# Altium PCB Localization.PcbDoc (part 2 of 2)
Units mil, origin at the board's own origin, x right, y up, seen from the top; angles counter-clockwise.
Board outline 3937.01 x 3937.01 mil, 4 copper layers (Top Layer, GND, POWER, GND_2), stack 23.756 mil thick; 104 components, 64 nets, 363 pads, 70 vias.
Unrouted connection lines stored in the file: 17.
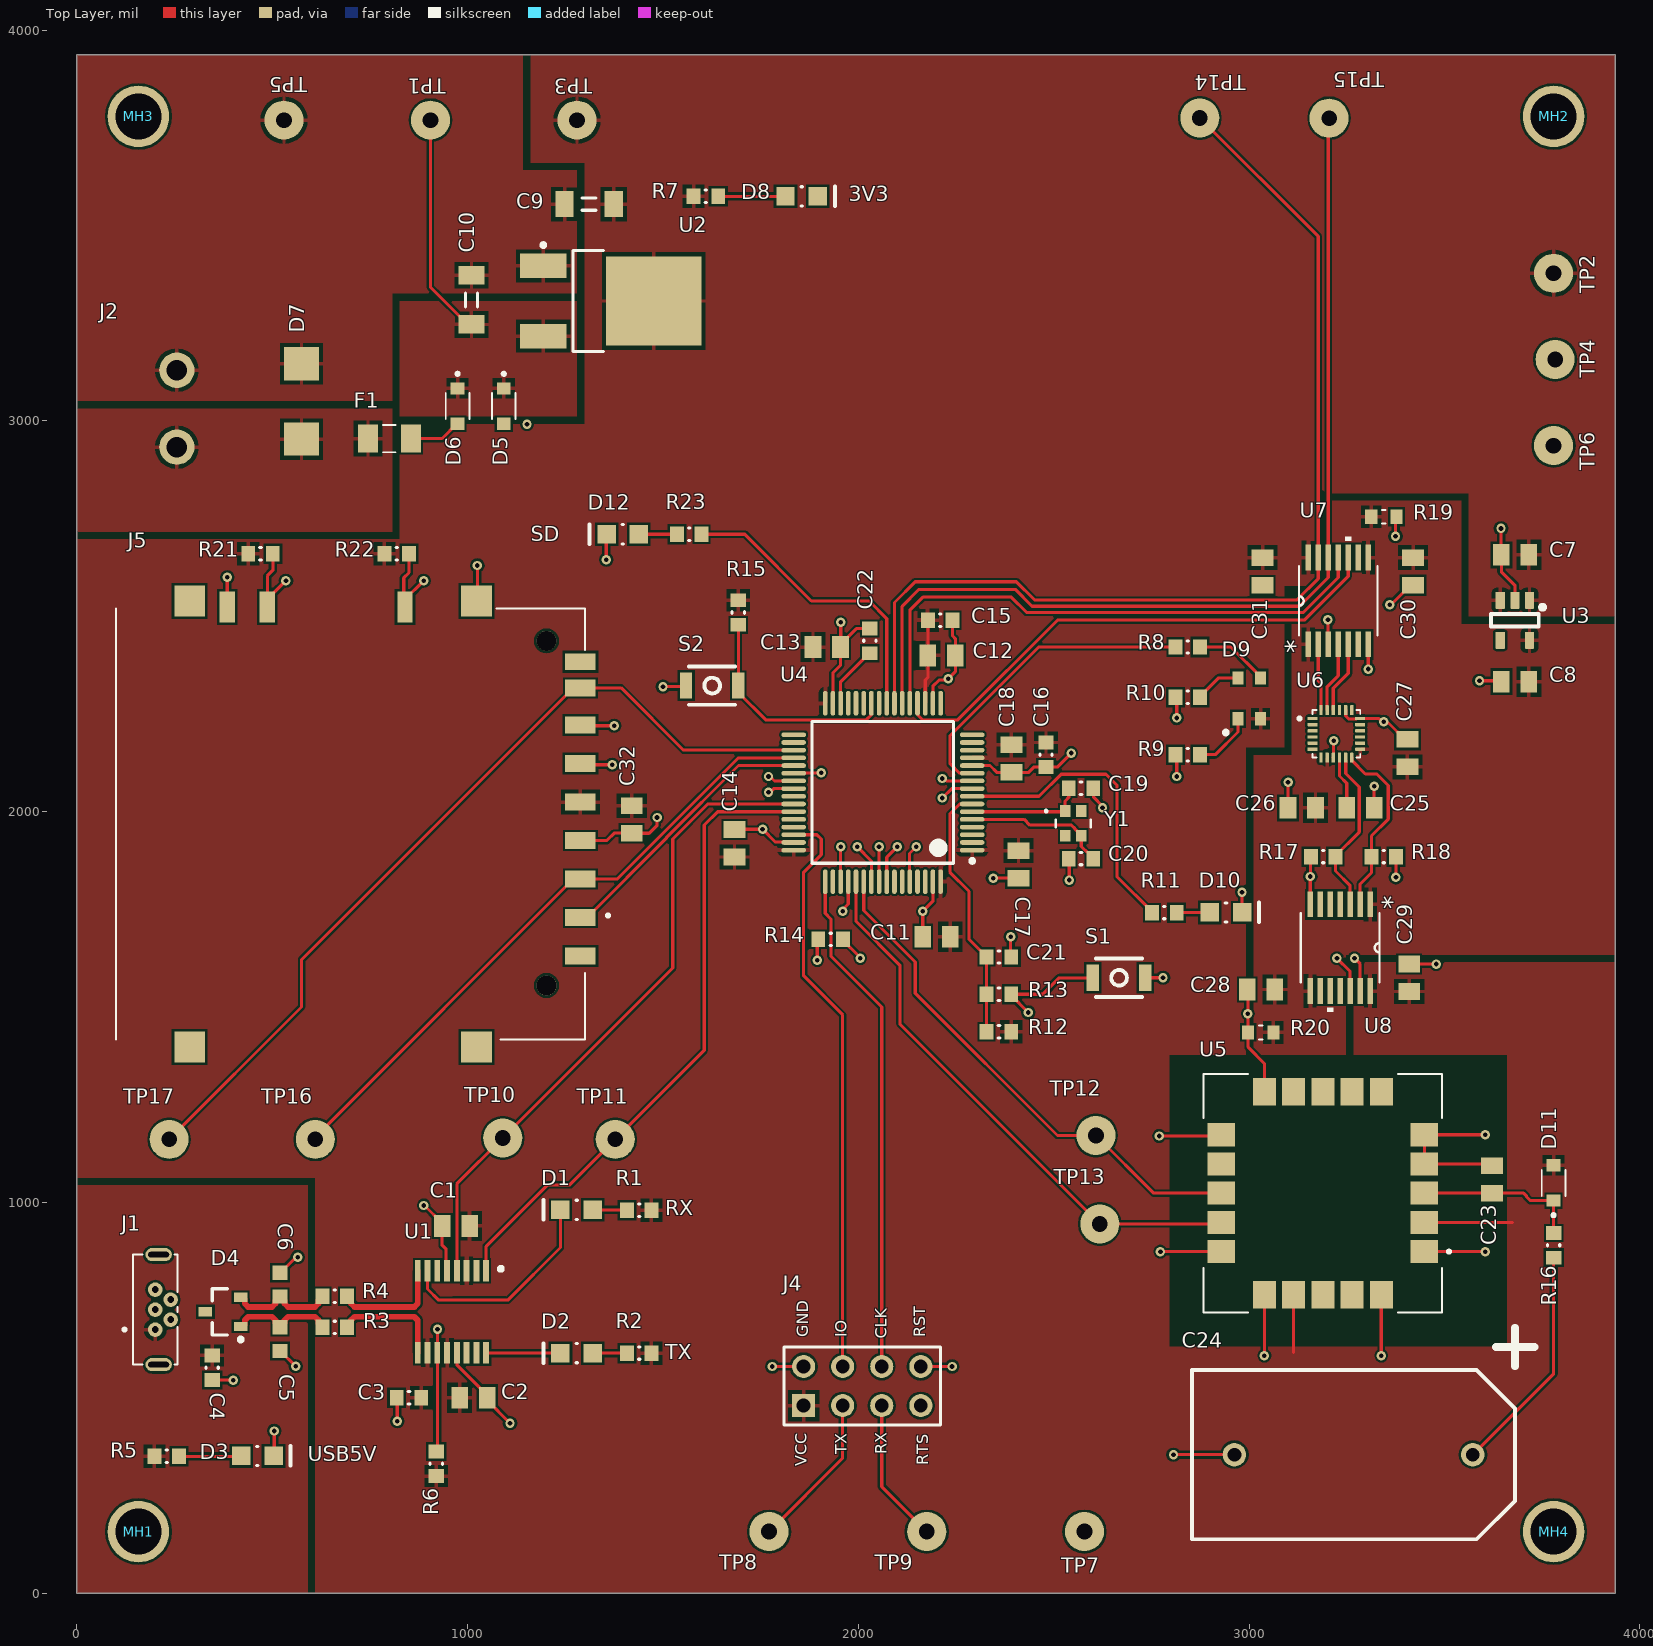
[diagram p0: Top Layer view]

## Via types
v1: diameter 24, hole 12, Top Layer to GND_2, 70 vias

## Nets (pads, with @x,y where several pads share a name; then routed paths per layer and width w, separated by ;. In a path a pad name is that pad's centre, name@x,y a point inside that pad or via, vN(x,y) a via of type N, cw(c..) or ccw(c..) an arc to the next point about the centre after c; other vN are vias at no path point) (continued)
USBD_R_P: (continued)
  Top Layer w15: D4.2 425.18,757.4 429.49,753.09 429.49,741.29 438.28,732.5 482.01,732.5 482.27,732.24 499.62,732.24 508.41,741.03 508.41,748.37 519.02,758.98 C6.1 520.98,758.98 531.59,748.37 531.59,741.03 540.38,732.24 576.27,732.24 576.52,732.5 609.5,732.5 618.29,741.29 618.29,749.78 R4.1
V_BCKP: C23.2 D11.2 R16.1 U5.3 | length 422.9
  Top Layer w8: U5.3 C23.2 3702.76,1023.62 3710.63,1015.75 3710.63,1013.78 3719.68,1004.72 D11.2 R16.1
pads on no net: J1.4 J4.4 J5. J5.8 J5.9 J5.14 J5.15 J5.16 MH1.0 MH2.0 MH3.0 MH4.0 U1.2 U1.6 U1.14 U1.15 U3.4 U4.2 U4.3 U4.4 U4.14 U4.15 U4.16 U4.17 U4.25 U4.27 U4.28 U4.29 U4.33 U4.34 U4.41 U4.44 U4.45 U4.50 U4.58 U4.59 U4.61 U4.62 U5.7 U5.8 U5.9 U5.12 U5.18 U5.19 U6.1 U6.7 U6.19 U6.21 U7.6 U7.9 U8.4 U8.5 U8.6 U8.9 U8.10 U8.11 Y1.4

## Polygon pours and split planes (outlines as drawn)
"USB 5V" on Top Layer "NONET_L-01_P-001" (solid, pour order 8): 590.55,0 590.55,1043.31 0,1043.31 0,0
3V3 on Top Layer "NONET_L-01_P-001" (solid, pour order 4): 3090.55,2578.74 3090.55,2165.55 3090,2165 2992.13,2165 2992.13,1978.35 2992.13,1377.95 2795.28,1377.95 2795.28,629.92 3661.42,629.92 3661.42,1377.95 3267.72,1377.95 3267.72,1614.17 3937.01,1614.17 3937.01,0 610.24,0 610.24,1062.99 0,1062.99 0,2696.85 826.77,2696.85 826.77,2992.13 1299.21,2992.13 1299.21,3661.42 1161.42,3661.42 1161.42,3937.01 3937.01,3937.01 3937.01,2500 3562.99,2500 3562.99,2814.96 3188.98,2814.96 3188.98,2578.74
1V8 on Top Layer "NONET_L-01_P-001" (solid, pour order 7): 3110.24,2559.06 3110,2558.82 3110,2145 3010,2145 3011.81,2143.19 3011.81,1377.95 3248.03,1377.95 3248.03,1633.86 3937.01,1633.86 3937.01,2480.32 3543.31,2480.32 3543.31,2795.28 3208.66,2795.28 3208.66,2559.06
GND on Top Layer "NONET_L-01_P-001" (solid, pour order 5): 0,3051.18 807.09,3051.18 807.09,3326.77 1279.53,3326.77 1279.53,3641.73 1141.73,3641.73 1141.73,3937.01 0,3937.01
5V on Top Layer "NONET_L-01_P-001" (solid, pour order 1): 826.77,3011.81 1280,3011.81 1280,3307.09 826.77,3307.09
5V_CON on Top Layer "NONET_L-01_P-001" (solid, pour order 0): 0,2720 3.46,2716.54 807.09,2716.54 807.09,3031.5 0,3031.5
3V3 on POWER "NONET_L-01_P-001" (solid, pour order 16): 3937.01,1338.58 3562.99,1338.58 3562.99,629.92 2814.96,629.92 2814.96,1358.27 2913.39,1358.27 2913.39,3307.09 3937.01,3307.09 3937.01,3937.01 0,3937.01 0,3110.24 1397.64,3110.24 1397.64,0 3937.01,0
"USB 5V" on POWER "NONET_L-01_P-001" (solid, pour order 3): 0,0 1377.95,0 1377.95,3090.55 0,3090.55
1V8 on POWER "NONET_L-01_P-001" (solid, pour order 2): 3937.01,3287.4 2933.07,3287.4 2933.07,1358.27 3937.01,1358.27
GND on GND "NONET_L-01_P-001" (solid, pour order 6): 3937.01,1377.95 2795.28,1377.95 2795.28,629.92 3937.01,629.92 3937.01,0 0,0 0,3937.01 3937.01,3937.01
GND on GND "NONET_L-01_P-001" (solid, pour order 12): 3937.01,1377.95 3562.99,1377.95 3562.99,629.92 3937.01,629.92
GND on GND_2 "NONET_L-01_P-001" (solid, pour order 14): 3937.01,1397.64 2795.28,1397.64 2795.28,649.61 3937.01,649.61 3937.01,0 0,0 0,3937.01 3937.01,3937.01
GND on GND_2 "NONET_L-01_P-001" (solid, pour order 15): 3937.01,1397.64 3562.99,1397.64 3562.99,649.61 3937.01,649.61

## Silkscreen, mask and mechanical layers (free items; w line width, h text height)
Top Overlay:
  text "3V3" at 1975,3550 h65
  text "SD" at 1162.17,2680 h65
  text "RX" at 1505.91,954.72 h65
  text "TX" at 1505.91,585.55 h65
  text "USB5V" at 590.55,324.8 h65

## Text inside footprints (layer, text, board x,y; h text height)
J4: Top Overlay "GND" at 1871.81,655.04 h30 r90; Top Overlay "VCC" at 1867.87,324.33 h30 r90; Top Overlay "RST" at 2171.81,655.04 h30 r90; Top Overlay "CLK" at 2072.6,651.1 h30 r90; Top Overlay "IO" at 1970.24,655.04 h30 r90; Top Overlay "RTS" at 2178.9,327.28 h30 r90; Top Overlay "RX" at 2072.6,355.91 h30 r90; Top Overlay "TX" at 1970.24,355.91 h30 r90
U7: Top Overlay "*" at 3142.57,2405.87 h50 r90; Mechanical 13 "*" at 3142.57,2405.87 h50 r90; Mechanical 7 "Default Padstyle: RX66Y14D0T" at 3528.85,2189.37 h50 r90; Mechanical 7 "Pin One Padstyle: RX66Y14D0T" at 3603.85,2189.37 h50 r90; Mechanical 7 "Alt 1 Padstyle: OX60Y90D30P" at 3678.85,2201.87 h50 r90; Mechanical 7 "Alt 2 Padstyle: OX90Y60D30P" at 3753.85,2201.87 h50 r90; Mechanical 7 "2.559055E-02in/.65mm" at 3176.87,2058.37 h25 r90
U8: Top Overlay "*" at 3319.12,1785.39 h50 r270; Mechanical 13 "*" at 3319.12,1785.39 h50 r270; Mechanical 7 "Default Padstyle: RX66Y14D0T" at 2932.85,2001.89 h50 r270; Mechanical 7 "Pin One Padstyle: RX66Y14D0T" at 2857.85,2001.89 h50 r270; Mechanical 7 "Alt 1 Padstyle: OX60Y90D30P" at 2782.85,1989.39 h50 r270; Mechanical 7 "Alt 2 Padstyle: OX90Y60D30P" at 2707.85,1989.39 h50 r270; Mechanical 7 "2.559055E-02in/.65mm" at 3284.82,2132.89 h25 r270
Y1: Mechanical 7 "0.079in/2.007mm" at 2456.25,1776 h25; Mechanical 7 "0.098in/2.489mm" at 2690.5,1957.5 h25; Mechanical 7 "0.063in/1.61mm" at 2234.5,1957.5 h25; Mechanical 7 "0.026in/0.66mm" at 2442,2121.69 h25; Mechanical 7 "0.067in/1.702mm" at 2456.25,2271.69 h25; Mechanical 7 "Alt 2 Padstyle: OX90Y60D30P" at 2212.5,1311 h50; Mechanical 7 "Alt 1 Padstyle: OX60Y90D30P" at 2212.5,1371 h50; Mechanical 7 "Default Padstyle: RX26Y30D0T" at 2200,1551 h50